# EAGLE board 7セグメントカウンタ回路20260909修正 (EAGLE 9.7.0)
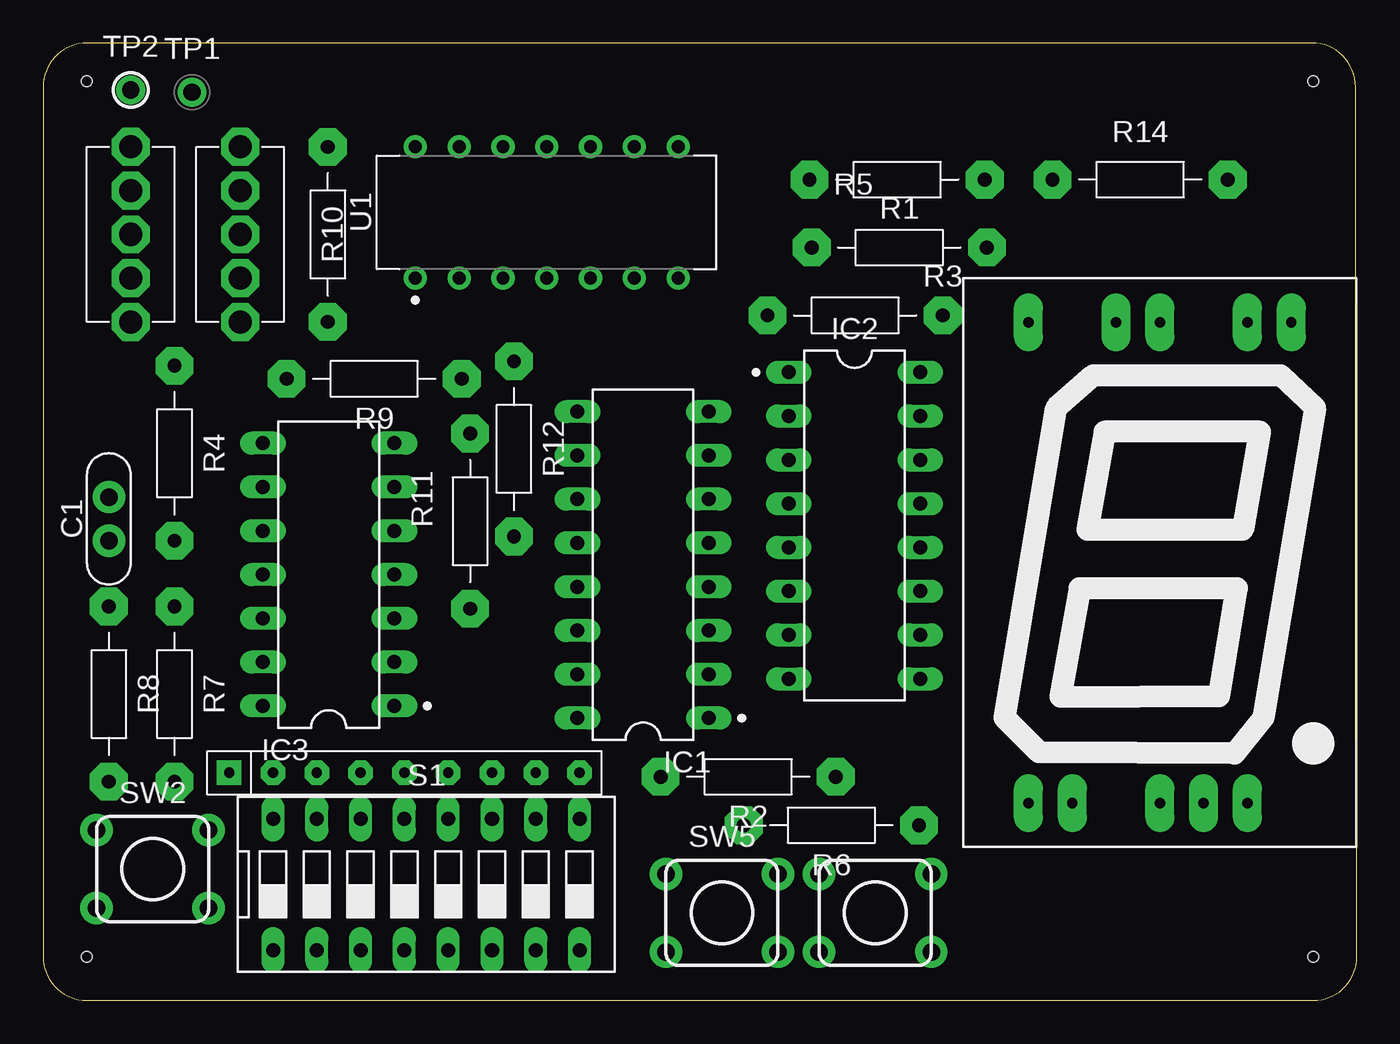
[diagram p0: board, top side]
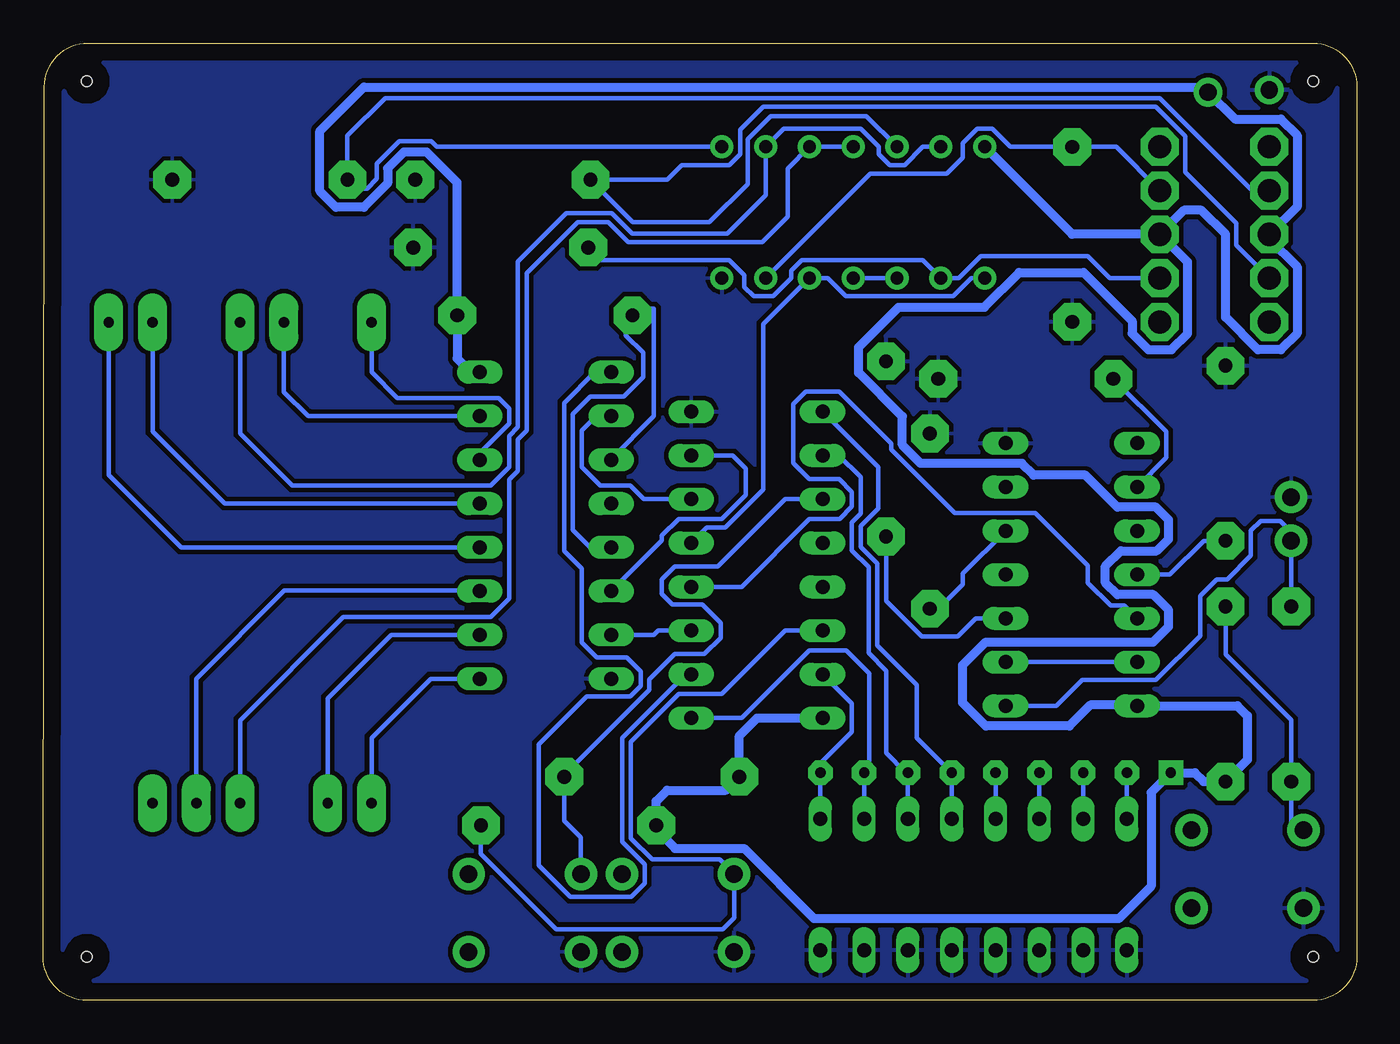
[diagram p1: board, bottom side, seen from below]

Size 76.2 x 55.55 mm. Coordinates in mm from the lower left corner, seen from the top.
Outline: 73.59,55.55 2.54,55.55 arc90 0,53.01 0,2.54 arc90 2.54,0 73.66,0 arc90 76.2,2.54 76.13,53.01 arc90 73.59,55.55
Copper layers (1*16): Top / Bottom
Stack-up Default Layer Stack: Top SilkScreen Epoxy Ink / Top SolderMask SR:Green 0.0254mm Dk 4.3 / Top Surface Finish Lead-Free 0.02mm / Top CuFoil:007 0.035mm / Dielectric-1 User Defined 1.5mm / Bottom CuFoil:007 0.035mm / Bottom Surface Finish Lead-Free 0.02mm / Bottom SolderMask SR:Green 0.0254mm Dk 4.3 / Bottom SilkScreen Epoxy Ink
Design rules: minimum copper width classes=1 20mil, minimum copper width 10mil, minimum drill size 0.6mm, copper clearance wire_polygon to wire_polygon 10mil, copper clearance wire_polygon to pad_smd 10mil, copper clearance wire_polygon to via 10mil, copper clearance pad_smd to pad_smd 10mil, copper clearance pad_smd to via 10mil, copper clearance via to via 10mil, copper clearance smd to pad (same net) 10mil, copper clearance smd to via (same net) 10mil, copper clearance smd to smd (same net) 10mil, dimension clearance 40mil, via restrict clearance 0mil, restrict clearance 0mil, drill distance 10mil, keepout clearance 0mil
Net classes: 1 power: width 0.508 mm
Holes 0.6 mm at 73.66,53.34 73.66,2.54 2.54,53.34 2.54,2.54

## Footprints (pad centres in the part's own frame; a part is rotated, then mirrored left to right if it is on the bottom)
CAP-THRU-2.54MM = drill 1.016 pad 1.88: 1 -1.27,0; 2 1.27,0
7SEG-NARG105 = drill 0.6 pad 1.676 long: 1 -7.62,-13.95; 2 -5.08,-13.95; 4 0,-13.95; 5 2.54,-13.95; 6 5.08,-13.95; 8 7.62,13.95; 9 5.08,13.95; 11 0,13.95; 12 -2.54,13.95; 14 -7.62,13.95
DIL16 = drill 0.813 long: 1 -3.81,8.89; 2 -3.81,6.35; 3 -3.81,3.81; 4 -3.81,1.27; 5 -3.81,-1.27; 6 -3.81,-3.81; 7 -3.81,-6.35; 8 -3.81,-8.89; 9 3.81,-8.89; 10 3.81,-6.35; 11 3.81,-3.81; 12 3.81,-1.27; 13 3.81,1.27; 14 3.81,3.81; 15 3.81,6.35; 16 3.81,8.89
DIL14 = drill 0.813 long: 1 -3.81,7.62; 2 -3.81,5.08; 3 -3.81,2.54; 4 -3.81,0; 5 -3.81,-2.54; 6 -3.81,-5.08; 7 -3.81,-7.62; 8 3.81,-7.62; 9 3.81,-5.08; 10 3.81,-2.54; 11 3.81,0; 12 3.81,2.54; 13 3.81,5.08; 14 3.81,7.62
AXIAL_PITCH400MIL = drill 0.8 pad 2.184 octagon: 1 -5.08,0; 2 5.08,0
RN8 = drill 0.6 pad 1.422 octagon: 1 0,-2.54; 2 0,-5.08; 3 0,-7.62; 4 0,-10.16; 5 0,-12.7; 6 0,-15.24; 7 0,-17.78; 8 0,-20.32 | drill 0.6 pad 1.422 square: COM 0,0
DS-08 = drill 0.813 long: 1 -8.89,-3.81; 2 -6.35,-3.81; 3 -3.81,-3.81; 4 -1.27,-3.81; 5 1.27,-3.81; 6 3.81,-3.81; 7 6.35,-3.81; 8 8.89,-3.81; 9 8.89,3.81; 10 6.35,3.81; 11 3.81,3.81; 12 1.27,3.81; 13 -1.27,3.81; 14 -3.81,3.81; 15 -6.35,3.81; 16 -8.89,3.81
TOGGLE_SWITCH = drill 1.34 pad 2.2 octagon: 1 -2.54,0; 2 0,0; 3 2.54,0; MTH1 -5.08,0; MTH2 5.08,0
SWITCH-MOMENTARY-PTH-6.5MM = drill 1.016 pad 1.88: 1 -3.251,2.261; 2 3.251,2.261; 3 -3.251,-2.261; 4 3.251,-2.261
TP-KEYSTONE-MINIATURE = drill 1 pad 1.676: TP 0,0
TP-KEYSTONE-COMPACT = drill 1 pad 1.676: TP 0,0
DIP762W53P254L1969H508Q14B = drill 0.743 pad 1.343: 1 -3.81,7.62; 2 -3.81,5.08; 3 -3.81,2.54; 4 -3.81,0; 5 -3.81,-2.54; 6 -3.81,-5.08; 7 -3.81,-7.62; 8 3.81,-7.62; 9 3.81,-5.08; 10 3.81,-2.54; 11 3.81,0; 12 3.81,2.54; 13 3.81,5.08; 14 3.81,7.62

## Placement (x,y rotation side)
C1  0.1u  [CAP-THRU-2.54MM]  3.81,27.94 90 top
DS1  7SEG-NARG105  [7SEG-NARG105]  64.77,25.4 0 top
IC1  74HC193TC74HC193AP(DIP)  [DIL16]  34.8,25.27 180 top
IC2  7447DIL16  [DIL16]  47.06,27.56 0 top
IC3  7414N  [DIL14]  16.56,24.71 180 top
R1  10K  [AXIAL_PITCH400MIL]  49.66,43.69 0 top
R2  10K  [AXIAL_PITCH400MIL]  40.89,12.98 180 top
R3  10k  [AXIAL_PITCH400MIL]  47.1,39.75 0 top
R4  10k  [AXIAL_PITCH400MIL]  7.62,31.75 270 top
R5  10K  [AXIAL_PITCH400MIL]  49.53,47.62 0 top
R6  10K  [AXIAL_PITCH400MIL]  45.72,10.16 180 top
R7  10K  [AXIAL_PITCH400MIL]  7.62,17.78 270 top
R8  10K  [AXIAL_PITCH400MIL]  3.81,17.78 270 top
R9  10k  [AXIAL_PITCH400MIL]  19.2,36.07 180 top
R10  10k  [AXIAL_PITCH400MIL]  16.51,44.45 90 top
R11  10k  [AXIAL_PITCH400MIL]  24.77,27.81 270 top
R12  10k  [AXIAL_PITCH400MIL]  27.3,32 270 top
R14  10k  [AXIAL_PITCH400MIL]  63.63,47.62 180 top
RN1  RN8RN8  [RN8]  10.79,13.21 90 top
S1  DS08  [DS-08]  22.23,6.73 0 top
SW1  TOGGLE_SWITCHES3P_TOGGLE_SWITCHES_DIP  [TOGGLE_SWITCH]  11.43,44.45 270 top
SW2  SWITCH_MOMENTARY  [SWITCH-MOMENTARY-PTH-6.5MM]  6.35,7.62 0 top
SW3  TOGGLE_SWITCHES3P_TOGGLE_SWITCHES_DIP  [TOGGLE_SWITCH]  5.08,44.45 270 top
SW4  SWITCH_MOMENTARY  [SWITCH-MOMENTARY-PTH-6.5MM]  48.26,5.08 0 top
SW5  SWITCH_MOMENTARY  [SWITCH-MOMENTARY-PTH-6.5MM]  39.37,5.08 0 top
TP1  TP_5000_MINIATURE  [TP-KEYSTONE-MINIATURE]  8.64,52.7 0 top
TP2  TP_5005_COMPACT  [TP-KEYSTONE-COMPACT]  5.08,52.83 0 top
U1  74HC02_PDIP  [DIP762W53P254L1969H508Q14B]  29.21,45.72 90 top

## Library data of the parts
C1 = Capacitor
DS1 = 7SEG-NARG105; CATEGORY: Opto-Electronic; SUB-CATEGORY: Display; TYPE: 7-Segment
IC1 = 74HC193
IC2 = 74series
IC3 = 74series; CATEGORY: Logic ICs; DESCRIPTION: Hex schmitt trigger Inverter 14-PDIP Through Hole; PACKAGE_SIZE: 14-PDIP; PACKAGE_TYPE: Through Hole; SUBCATEGORY: Gates and Inverters; TYPE: Inverter
R1-R12 R14 RN1 = resistor
S1 = DIP-SW; CATEGORY: Switches; DATASHEET: https://www.farnell.com/datasheets/2925626.pdf; DESCRIPTION: DIP Switch Slide Type 8Pos SPST-NO Raised Actuator Red TH; MANUFACTURER: Multicomp Pro; MPN: MCNDS-08V; OPERATING_TEMPERATURE: -40°C ~ 85°C; PACKAGE_SIZE: NA; PACKAGE_TYPE: Through Hole; PART_STATUS: Obsolete; ROHS: Compliant; SUBCATEGORY: DIP Switches; TYPE: SPST-NO
SW1 SW3 = Toggle_Switches
SW2 SW4 SW5 = Tact_switch
TP1 = TerminaiPoint; CATEGORY_L1: Test Points; CATEGORY_L2: PC Test Point; DATASHEET: https://www.keyelco.com/userAssets/file/K75p62.pdf; DESCRIPTION: Red PC Test Point, Miniature Phosphor Bronze Silver Plating Through Hole Mounting Type; MANUFACTURER: Keystone Electronics; MPN: 5000; PACKAGE: Through Hole; PART_STATUS: Active; ROHS: Compliant; SERIES: THM
TP2 = TerminaiPoint; CATEGORY_L1: Test Points; CATEGORY_L2: PC Test Point; DATASHEET: https://www.keyelco.com/userAssets/file/K75p62.pdf; DESCRIPTION: Red PC Test Point, Compact Phosphor Bronze Silver Plating Through Hole Mounting Type; MANUFACTURER: Keystone Electronics; MPN: 5005; PACKAGE: Through Hole; PART_STATUS: Active; ROHS: Compliant; SERIES: THM
U1 = IC_Logic; CATEGORY_L1: Logic ICs; CATEGORY_L2: Gates and Inverters; CATEGORY_L3: NOR Gate; DATASHEET: https://www.ti.com/lit/ds/symlink/cd74hc02.pdf; DESCRIPTION: Quadruple 2-Input NOR Gates 14-PDIP Through Hole; MANUFACTURER: Texas Instruments; MPN: CD74HC02E; OPERATING_TEMPERATURE: -55°C ~ 125°C; PACKAGE: Through Hole; PACKAGE_SIZE: 14-PDIP; PART_STATUS: Active; ROHS: Compliant; SERIES: 74HC

## Nets
193QA_TO_47INA: IC1.3 IC2.7
193QB_TO_47INB: IC1.2 IC2.1
193QC_TO_47INC: IC1.6 IC2.2
193QD_TO_47IND: IC1.7 IC2.6
+5.0V [power]: IC1.16 IC2.16 IC3.14 R2.2 R3.2 R6.2 R7.2 RN1.COM SW1.2 SW3.2 TP1.TP U1.14
COUNTER_STOP: R10.2 SW1.1 U1.6
GND [power]: C1.2 IC1.8 IC2.8 IC3.7 R1.2 R4.1 R5.2 R9.1 R10.1 R11.1 R12.1 R14.1 S1.1 S1.2 S1.3 S1.4 S1.5 S1.6 S1.7 S1.8 SW2.3 SW4.3 SW5.3 TP2.TP U1.7
IN_7SEG_4: DS1.11 U1.9 U1.13
IN_7SEG_11: DS1.4 U1.10 U1.11
IN_193_A: IC1.15 RN1.8 S1.9
IN_193_B: IC1.1 RN1.7 S1.10
IN_193_C: IC1.10 RN1.6 S1.11
IN_193_D: IC1.9 RN1.5 S1.12
IN_193_DOWN: IC1.4 IC3.12
IN_193_UP: IC1.5 U1.1 U1.5
N$1: IC3.3 R12.2
N$2: U1.3 U1.4
N$3: IC3.5 R11.2
N$4: IC3.2 IC3.13
N$5: IC3.9 R9.2
N$6: IC3.11 R4.2
N$9: RN1.4 S1.13
N$12: RN1.1 S1.16
N$14: RN1.3 S1.14
N$15: IC2.3 IC2.5 R3.1
N$21: RN1.2 S1.15
N$40: DS1.14 IC2.14
N$41: DS1.12 IC2.15
N$42: DS1.1 IC2.9
N$43: DS1.2 IC2.10
N$44: DS1.5 IC2.11
N$45: DS1.8 IC2.12
N$46: DS1.9 IC2.13
SIG_CLR: IC1.14 R6.1 SW5.1
SIG_DOWNCLK: C1.1 IC3.1 R8.1
SIG_DWCLK: R7.1 R8.2 SW2.1
SIG_GREEN: R5.1 SW3.3 U1.12
SIG_LOAD: IC1.11 R2.1 SW4.1
SIG_RED: R14.2 SW3.1 U1.8
SIG_UPCLK: R1.1 SW1.3 U1.2

## Tracks (layer width: path | path; a pad name or v marks a point on that pad's centre or on a via)
193QA_TO_47INA
  Bottom 0.254: IC2.7 40.77,21.21 40.51,21.46 IC1.3
193QB_TO_47INB
  Bottom 0.254: IC2.1 44.2,36.45 45.97,34.67 45.97,26.08 44.95,25.06 44.95,20.78 44.09,19.91 42.36,19.91 41.55,19.1 41.55,18.24 42.16,17.63 44.68,17.63 47.45,14.86 47.45,7.84 45.62,6.02 42.07,6.02 41.3,6.79 41.3,7.89 42.62,9.21 42.62,15.22 38.92,18.92 IC1.2
193QC_TO_47INC
  Bottom 0.254: IC2.2 44.11,33.91 44.95,33.07 44.95,30.94 43.88,29.87 42.16,29.87 41.37,29.08 IC1.6
193QD_TO_47IND
  Bottom 0.254: IC1.7 36.2,31.62 35.43,30.86 35.43,29.34 36.83,27.94 39.34,27.94 40.31,26.97 40.31,26.69 IC2.6
+5.0V
  Bottom 0.508: IC2.16 51.38,36.45 52.18,37.25 R3.2 52.18,47.46 53.95,49.23 55.27,49.23 56.21,48.29 56.21,47.41 57.6,46.02 59.21,46.02 60.15,46.96 60.15,50.45 57.6,53 8.93,53 TP1.TP 7.07,51.14 4.41,51.14 3.47,50.2 3.47,46.06 SW3.2 5.08,44.18 3.47,42.58 3.47,38.7 4.41,37.76 5.75,37.76 7.62,39.64 7.62,44.45 9.02,45.85 10.03,45.85 SW1.2 | SW1.2 16.51,44.45 U1.14 | SW1.2 9.82,42.84 9.82,38.7 10.76,37.76 12.1,37.76 13.04,38.7 13.04,39.43 15.85,42.24 19.59,42.24 21.61,40.22 26.58,40.22 28.91,37.9 28.91,36.42 26.37,33.88 26.37,32.23 25.3,31.16 19.43,31.16 18.75,30.48 15.75,30.48 13.9,28.62 11.66,28.62 10.92,27.89 10.92,26.77 11.61,26.08 13.69,26.08 14.58,25.2 14.58,24.23 13.9,23.54 11.81,23.54 10.92,22.66 10.92,21.69 11.81,20.8 21.52,20.8 22.86,19.46 22.86,17.27 21.52,15.92 16.68,15.92 15.46,17.14 12.8,17.14 IC3.14 6.93,17.09 6.35,16.51 6.35,13.97 R7.2 8.89,12.7 9.4,13.21 RN1.COM 11.94,12.07 11.94,6.63 13.82,4.75 31.48,4.75 35.54,8.81 39.55,8.81 40.64,9.91 R6.2 40.64,11.56 40,12.19 36.6,12.19 R2.2 35.81,15.36 34.79,16.38 IC1.16
COUNTER_STOP
  Bottom 0.254: SW1.1 13.97,49.53 R10.2 20.1,49.53 21.15,50.58 22.03,50.58 22.86,49.75 22.86,48.9 23.79,47.97 28.23,47.97 U1.6
GND
  pour Bottom: -1.27,57.15 78.74,57.15 78.74,-1.27 -1.27,-1.27
IN_7SEG_4
  Bottom 0.254: DS1.11 64.77,32.89 61.75,29.87 50.23,29.87 49.17,30.94 49.17,32.76 48.66,33.27 48.66,42.87 45.86,45.67 43.21,45.67 42.04,44.5 36.53,44.5 34.29,46.74 U1.9 33.24,50.58 28.77,50.58 27.72,49.53 27.72,49.09 27.11,48.48 26.23,48.48 25.18,49.53 U1.13
IN_7SEG_11
  Bottom 0.254: DS1.4 64.77,16.26 58.78,22.25 50.23,22.25 49.17,23.32 49.17,30.22 48.66,30.73 48.66,32.55 48.15,33.06 48.15,42.2 45.19,45.16 43.42,45.16 42.25,43.99 34.5,43.99 33.02,45.47 33.02,48.26 U1.10 U1.11
IN_193_A
  Bottom 0.254: S1.9 RN1.8 31.11,13.74 29.29,15.57 29.29,17.22 IC1.15
IN_193_B
  Bottom 0.254: S1.10 RN1.7 28.57,13.59 28.27,13.89 28.27,18.97 29.62,20.32 31.75,20.32 35.69,16.38 IC1.1
IN_193_C
  Bottom 0.254: S1.11 RN1.6 26.16,13.21 27.3,14.35 27.3,19.13 28.32,20.15 28.32,25.14 29.29,26.1 29.29,27.75 28.78,28.25 28.78,30.36 30.04,31.62 IC1.10
IN_193_D
  Bottom 0.254: S1.12 RN1.5 25.53,15.24 25.53,18.31 27.81,20.6 27.81,25.35 28.78,26.31 28.78,27.53 27.76,28.55 27.76,30.94 IC1.9
IN_193_DOWN
  Bottom 0.254: IC1.4 35.69,24 31.75,27.94 30,27.94 29.29,28.65 29.29,29.51 30.02,30.25 31.75,30.25 32.69,31.19 32.69,34.59 31.95,35.33 30.02,35.33 27,32.31 27,31.97 23.33,28.29 18.65,28.29 15.6,25.25 15.6,24.22 14.29,22.91 13.49,22.91 IC3.12
IN_193_UP
  Bottom 0.254: IC1.5 37.72,27.43 36.62,27.43 34.42,29.63 34.42,39.24 U1.5 30.7,41.91 29.65,40.86 23.41,40.86 22.36,41.91 U1.1
N$1
  Bottom 0.254: IC3.3 22.1,22.17 23.14,21.13 25.25,21.13 27.3,23.19 R12.2
N$2
  Bottom 0.254: U1.3 U1.4
N$3
  Bottom 0.254: IC3.5 22.86,24.77 22.86,24.13 24.26,22.73 R11.2
N$4
  Bottom 0.254: IC3.2 IC3.13
N$5
  Bottom 0.254: R9.2 11.05,33 11.05,31.49 IC3.9
N$6
  Bottom 0.254: IC3.11 10.85,24.71 8.89,26.67 R4.2
N$9
  Bottom 0.254: S1.13 RN1.4
N$12
  Bottom 0.254: S1.16 RN1.1
N$14
  Bottom 0.254: RN1.3 S1.14
N$15
  Bottom 0.254: IC2.3 43.25,31.43 40.77,33.91 40.77,40.13 41.64,40.13 R3.1 42.4,39.37 42.4,38.59 41.4,37.59 41.4,36.16 42.51,35.05 44.45,35.05 45.47,34.04 45.47,27.3 44.45,26.29 IC2.5
N$21
  Bottom 0.254: S1.15 RN1.2
N$40
  Bottom 0.254: DS1.14 57.15,36.45 55.65,34.95 49.78,34.95 49.17,34.34 49.17,33.48 50.87,31.78 IC2.14
N$41
  Bottom 0.254: DS1.12 62.23,35.31 60.83,33.91 IC2.15
N$42
  Bottom 0.254: DS1.1 57.15,15.24 53.72,18.67 IC2.9
N$43
  Bottom 0.254: DS1.2 59.69,17.53 56.01,21.21 IC2.10
N$44
  Bottom 0.254: DS1.5 67.31,18.67 62.2,23.77 50.89,23.77 IC2.11
N$45
  Bottom 0.254: DS1.8 72.39,30.48 68.2,26.29 IC2.12
N$46
  Bottom 0.254: DS1.9 69.85,33.02 65.66,28.83 IC2.13
SIG_CLR
  Bottom 0.254: IC1.14 33.15,21.46 36.83,17.78 39.34,17.78 42.11,15.01 42.11,9.42 40.87,8.18 36.96,8.18 SW5.1 36.12,4.8 36.78,4.14 46.44,4.14 50.8,8.5 R6.1
SIG_DOWNCLK
  Bottom 0.254: R8.1 C1.1 3.81,27.18 4.45,27.81 5.59,27.81 6.15,27.25 6.15,25.81 7.52,24.44 8.13,24.44 9.09,23.47 9.09,21.16 11.66,18.59 15.93,18.59 17.43,17.09 IC3.1
SIG_DWCLK
  Bottom 0.254: SW2.1 3.81,9.88 R8.2 3.81,16.27 7.62,20.07 R7.1
SIG_GREEN
  Bottom 0.254: U1.12 28.45,51.31 34,51.31 35.34,49.97 35.34,47.37 37.55,45.16 41.99,45.16 R5.1 40,47.62 39.15,48.48 36.39,48.48 35.78,49.09 35.78,50.52 34.44,51.85 11.66,51.85 9.95,50.14 9.95,48.06 6.99,45.09 6.99,43.81 SW3.3
SIG_LOAD
  Bottom 0.254: IC1.11 33.15,29.08 37.06,25.17 39.57,25.17 40.31,24.43 40.31,23.57 39.7,22.96 37.97,22.96 36.91,21.89 36.91,21.03 37.85,20.09 39.57,20.09 41.04,18.62 41.04,18.03 45.97,13.09 R2.1 45.97,10.41 45.01,9.45 SW4.1
SIG_RED
  Bottom 0.254: SW3.1 6.08,46.99 11.45,52.36 56.35,52.36 58.55,50.16 R14.2 58.04,47.12 57.4,47.12 56.84,47.68 56.84,48.55 55.54,49.86 55.24,49.86 53.68,49.86 53.35,49.53 U1.8
SIG_UPCLK
  Bottom 0.254: R1.1 43.85,42.96 36.39,42.96 35.52,42.09 35.52,41.4 34.98,40.86 33.85,40.86 32.8,41.91 32.8,42.35 32.19,42.96 25.18,42.96 U1.2 23.08,41.91 21.81,43.18 15.61,43.18 14.34,41.91 SW1.3